# Altium PCB Board.PcbDoc
Units mil, origin at the board's own origin, x right, y up, seen from the top; angles counter-clockwise.
Board outline 1615 x 2290 mil, 2 copper layers (Top Layer, Bottom Layer); 2 components, 6 nets, 110 pads, 5 vias.
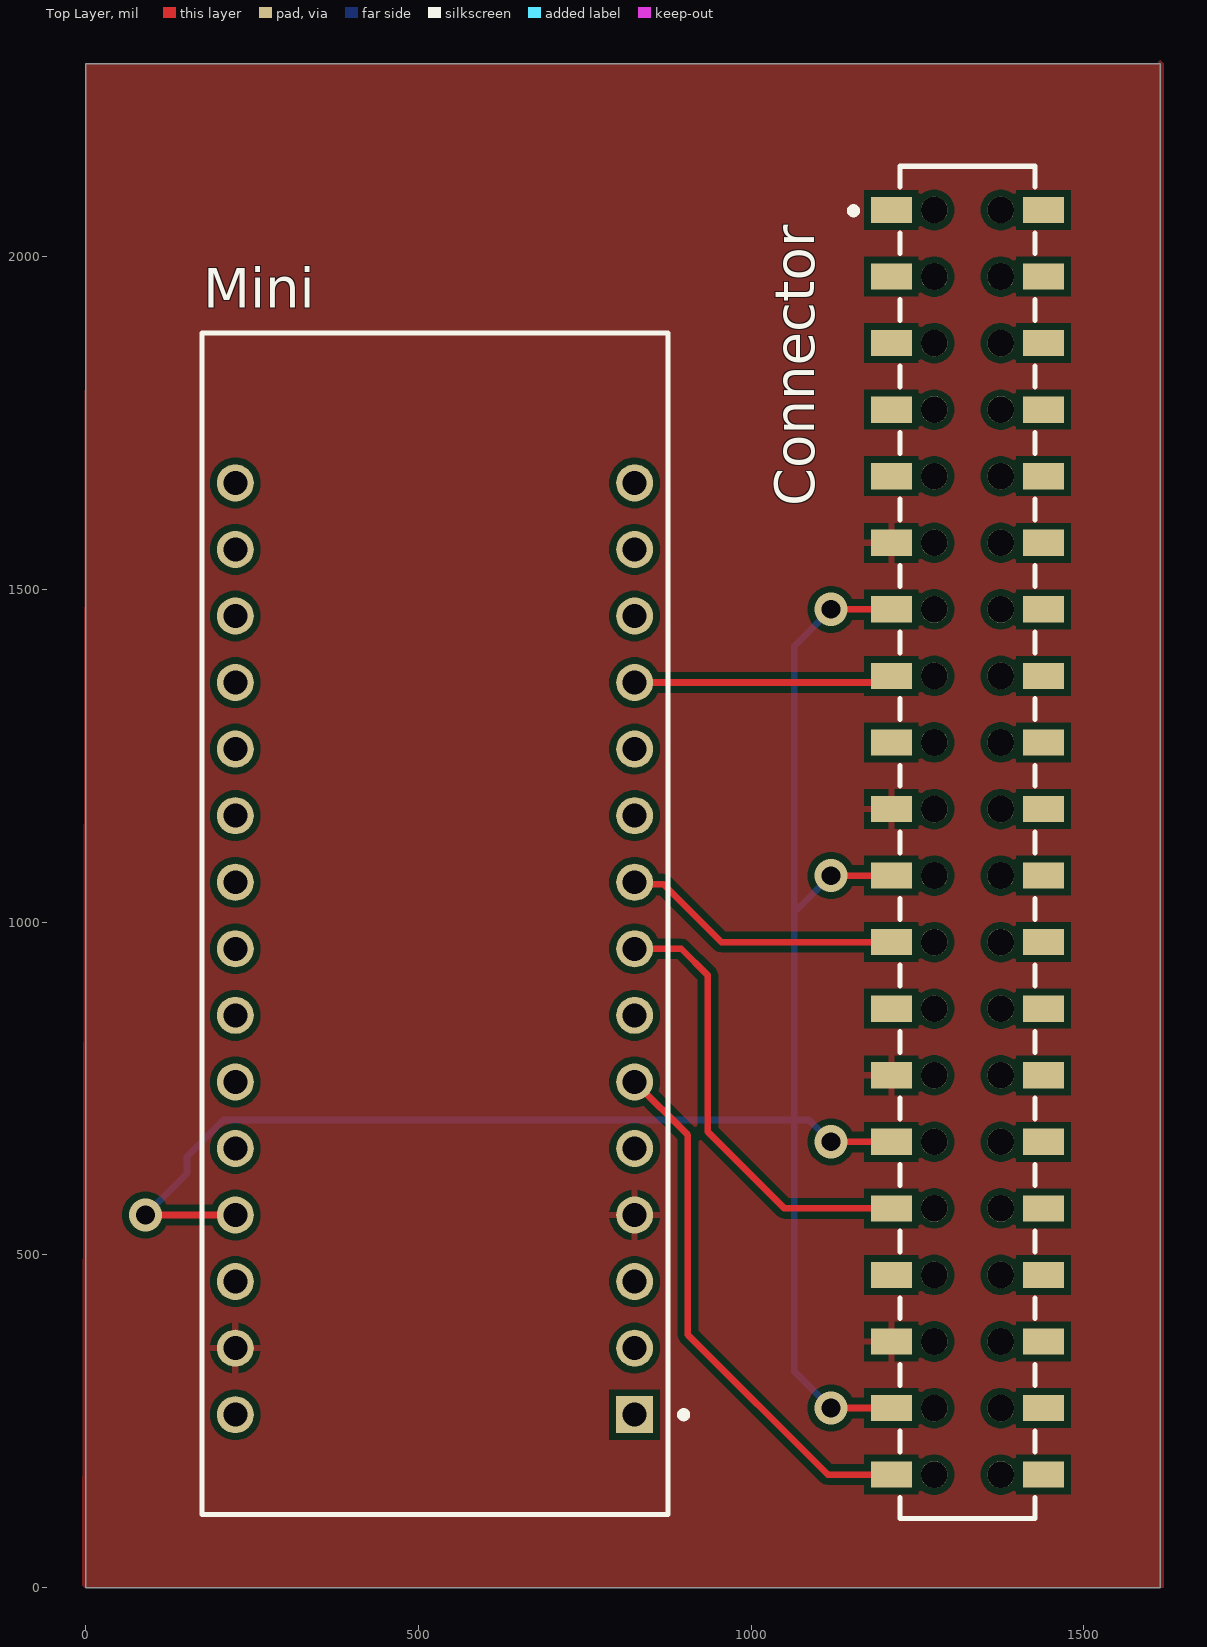
[diagram p0: Top Layer view]
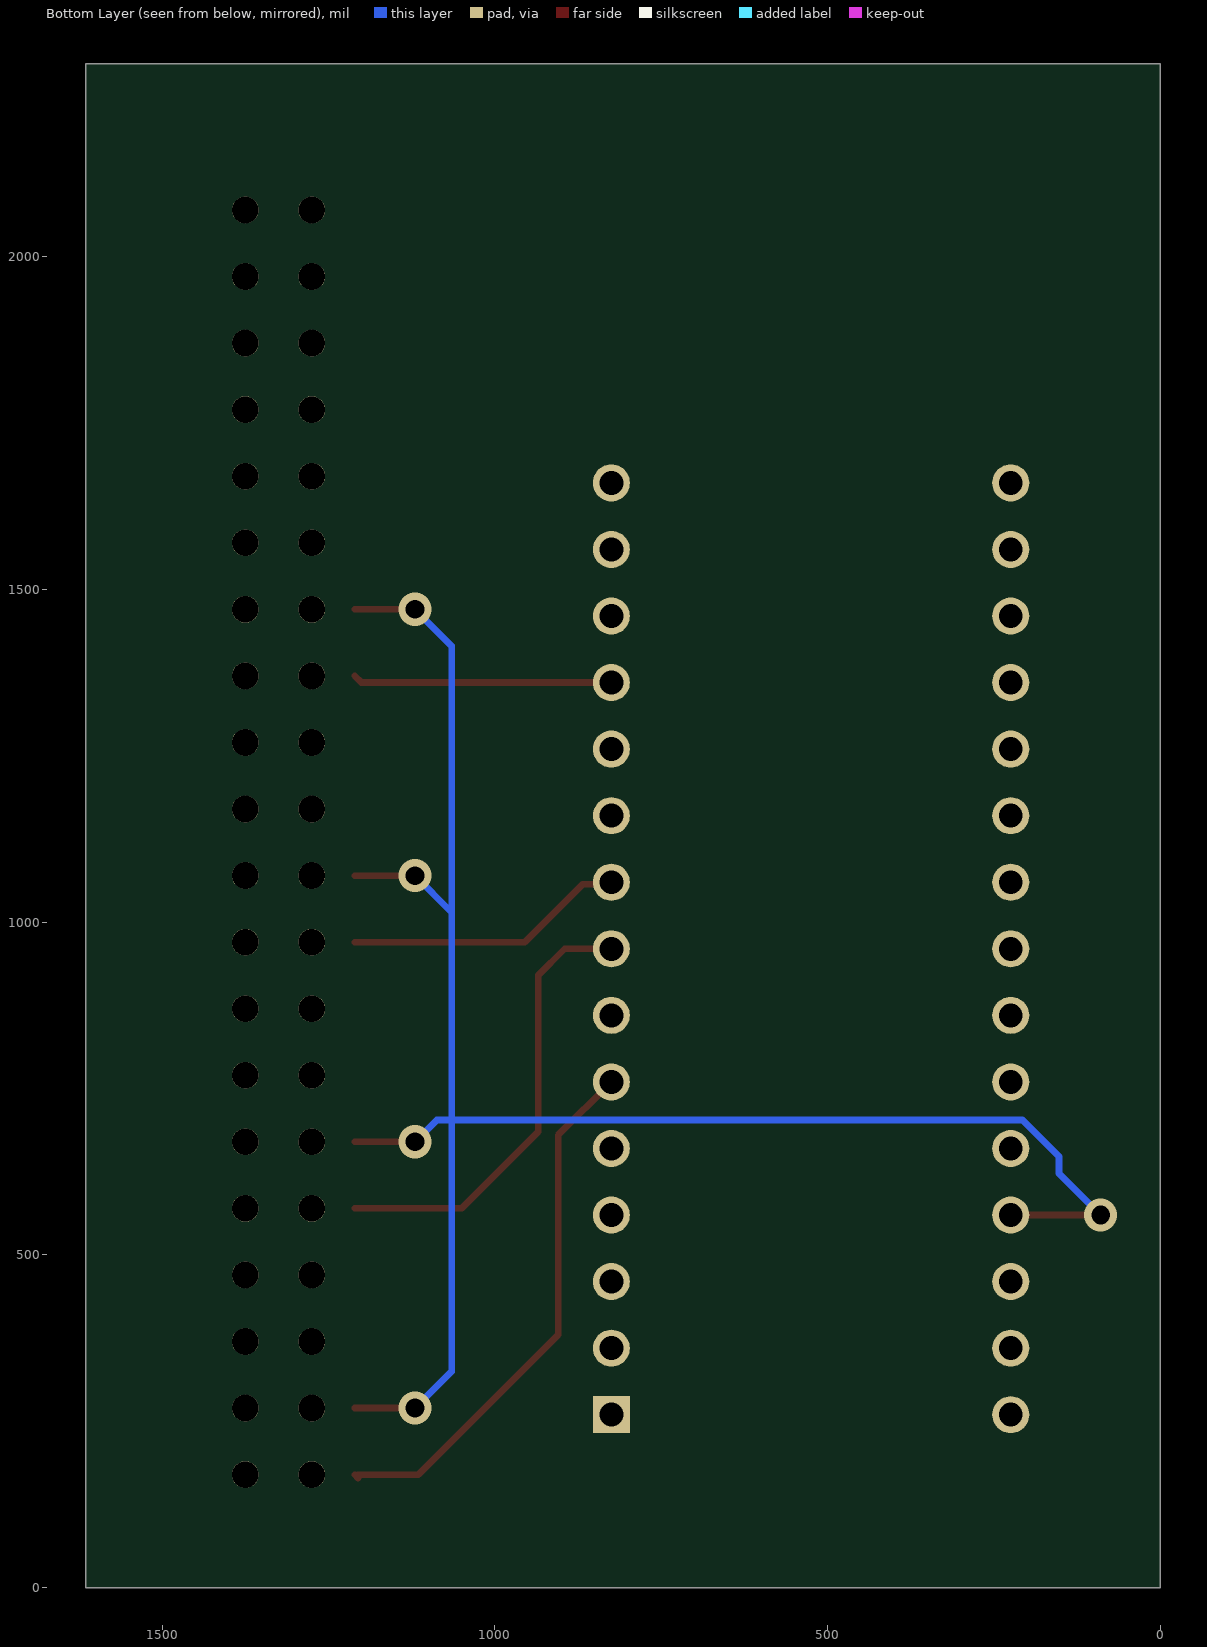
[diagram p1: Bottom Layer view, seen from below]

## Layer stack, top to bottom
Top Solder: solder mask 0.4, Solder Resist, Dk 3.5
Top Layer: signal copper 0.3543
Dielectric 1: dielectric 12.6, FR-4, Dk 4.8
Bottom Layer: signal copper 0.3543
Bottom Solder: solder mask 0.4, Solder Resist, Dk 3.5

## Board outline
0,0 1615,0 1615,2290 0,2290

## Design rules (kind name [scope] priority, off if disabled: settings)
Clearance [All] p1: gap=10 ignorepadtopadclearanceinfootprint=FALSE except(0: Arc-Hole Track-Hole SMDPad-Hole THPad-Hole Via-Hole Fill-Hole Poly-Hole Region-Hole Text-Hole)
PolygonConnect [All] p1: connectstyle=Relief reliefconductorwidth=10 reliefentries=4 polygonreliefangle="90 Angle" airgapwidth=10
RoutingVias [All] p1: holewidth=28 width=50 viastyle="Through Hole" minholewidth=28 minwidth=50 maxholewidth=28 maxwidth=50
SolderMaskExpansion [All] p1: expansion=4 istentingtop=FALSE
Width [All] p1: maxlimit=10 minlimit=10 preferedwidth=10
30 further rules are at their usual default settings.

## Components (designator, comment, footprint, x,y, rotation, side; value= is the part's Value field where it differs from the comment)
Connector "NPTC202KFMS-RC" FP-NPTC202KFMS-RC-MFG 1325,1120 r270 top (schematic designator J?)
Mini "A000005" FP-A000005-MFG 525,997.5 r180 top (schematic designator MD?)

## Footprints (in the part's own frame and the unit in brackets; to place one, negate y for a bottom-side part, rotate by r counter-clockwise, add the part's x,y. Pads: shape width x height; smd on the part's side, far side on the other; paste and mask are expansions set on the pad)
FP-A000005-MFG [mil]
  rect 55.67x55.67 hole 35.98 paste-39370.1 mask+0: 1(-300,737.5)
  round 55.67 hole 35.98 paste-39370.1 mask+0: 2(-300,637.5) 3(-300,537.5) 4(-300,437.5) 5(-300,337.5) 6(-300,237.5) 7(-300,137.5) 8(-300,37.5) 9(-300,-62.5) 10(-300,-162.5) 11(-300,-262.5) 12(-300,-362.5) 13(-300,-462.5) 14(-300,-562.5) 15(-300,-662.5) 16(300,-662.5) 17(300,-562.5) 18(300,-462.5) 19(300,-362.5) 20(300,-262.5) 21(300,-162.5) 22(300,-62.5) 23(300,37.5) 24(300,137.5) 25(300,237.5) 26(300,337.5) 27(300,437.5) 28(300,537.5) 29(300,637.5) 30(300,737.5)
  silkscreen extent -379,-888 350,888, body extent -354,-891 354,891, height 10
FP-NPTC202KFMS-RC-MFG [mm]
  rect 1x1.56 smd paste+0 mask+0: 1(-24.13,-2.905) 2(-24.13,2.905) 3(-21.59,-2.905) 4(-21.59,2.905) 5(-19.05,-2.905) 6(-19.05,2.905) 7(-16.51,-2.905) 8(-16.51,2.905) 9(-13.97,-2.905) 10(-13.97,2.905) 11(-11.43,-2.905) 12(-11.43,2.905) 13(-8.89,-2.905) 14(-8.89,2.905) 15(-6.35,-2.905) 16(-6.35,2.905) 17(-3.81,-2.905) 18(-3.81,2.905) 19(-1.27,-2.905) 20(-1.27,2.905) 21(1.27,-2.905) 22(1.27,2.905) 23(3.81,-2.905) 24(3.81,2.905) 25(6.35,-2.905) 26(6.35,2.905) 27(8.89,-2.905) 28(8.89,2.905) 29(11.43,-2.905) 30(11.43,2.905) 31(13.97,-2.905) 32(13.97,2.905) 33(16.51,-2.905) 34(16.51,2.905) 35(19.05,-2.905) 36(19.05,2.905) 37(21.59,-2.905) 38(21.59,2.905) 39(24.13,-2.905) 40(24.13,2.905)
  round 1.02 hole 1.02 unplated paste-1000 mask+0: ""(-24.13,-1.27) ""(-24.13,1.27) ""(-21.59,-1.27) ""(-21.59,1.27) ""(-19.05,-1.27) ""(-19.05,1.27) ""(-16.51,-1.27) ""(-16.51,1.27) ""(-13.97,-1.27) ""(-13.97,1.27) ""(-11.43,-1.27) ""(-11.43,1.27) ""(-8.89,-1.27) ""(-8.89,1.27) ""(-6.35,-1.27) ""(-6.35,1.27) ""(-3.81,-1.27) ""(-3.81,1.27) ""(-1.27,1.27) ""(-1.27,-1.27) ""(1.27,1.27) ""(1.27,-1.27) ""(3.81,-1.27) ""(3.81,1.27) ""(6.35,-1.27) ""(6.35,1.27) ""(8.89,-1.27) ""(8.89,1.27) ""(11.43,-1.27) ""(11.43,1.27) ""(13.97,-1.27) ""(13.97,1.27) ""(16.51,-1.27) ""(16.51,1.27) ""(19.05,-1.27) ""(19.05,1.27) ""(21.59,-1.27) ""(21.59,1.27) ""(24.13,-1.27) ""(24.13,1.27)
  silkscreen extent -25.8,-4.47 25.8,2.58, body extent -25.9,-3.78 25.9,3.78, height 0.25

## Part data
Connector: library part CMP-25680-000011-1, "CONN HDR 40POS 0.1 TIN SMD", Current Rating=3A, Manufacturer="Sullins Connector Solutions", Package=0, Temperature="-40°C to +105°C", Temperature Range High=+105°C, Temperature Range Low=-40°C, Voltage Rating=250V, Automotive=No, Category=Conn, ComponentLink2Description=Datasheet, ComponentLink2URL=https://s3.amazonaws.com/catalogspreads-pdf/PAGE118-119%20.100%20FEMALE%20HDR.pdf, Conn Gender=Female, Conn Orientation=Straight, Contact Material=Tin,Nickel, Device Class L1=Connectors, Device Class L2="Headers and Wire Housings", Device Class L3=unset, Digikey Description="CONN HDR 40POS 0.1 TIN SMD", Footprint Url=https://drawings-pdf.s3.amazonaws.com/10488.pdf, Height=7.75mm, Is Female=yes, Lead Free=Yes, Manufacturer Part Number=NPTC202KFMS-RC, Number Of Contacts=40, Number Of Rows=2, Octopart=https://octopart.com/nptc202kfms-rc-sullins-270594, Pitch=2.54mm, RoHS=TRUE
Mini: library part CMP-189986-000002-1, "ARDUINO NANO ATMEGA328 EVAL BRD", Operating Supply Voltage=12V, Package Quantity=50, Core Architecture=AVR, Data Bus Width=8b, Evaluation Kit=Yes, Height=0.25inch, Interface=I2C, Length=7inch, Number of Bits=8, Packaging=Bulk, REACH SVHC="No SVHC", Series="AVR® ATmega", Weight=0.358383oz, Width=5inch

## Via types
v1: diameter 50, hole 28, Top Layer to Bottom Layer, 5 vias

## Nets (pads, with @x,y where several pads share a name; then routed paths per layer and width w, separated by ;. In a path a pad name is that pad's centre, name@x,y a point inside that pad or via, vN(x,y) a via of type N, cw(c..) or ccw(c..) an arc to the next point about the centre after c; other vN are vias at no path point)
GND: Connector.11 Connector.19 Connector.27 Connector.35 Mini.4 Mini.29
NetJ?_13: Connector.13 Connector.21 Connector.29 Connector.37 Mini.27 | length 2938.6
  Top Layer w10: v1(90,560) Mini.27 ; v1(1120,270) Connector.37 ; v1(1120,670) Connector.29 ; v1(1120,1070) Connector.21 ; v1(1120,1470) Connector.13
  Bottom Layer w10: v1(90,560) 152.46,622.46 152.46,648.03 207.26,702.83 1065,702.83 ; v1(1120,270) 1065,325 1065,702.83 ; v1(1120,670) 1087.17,702.83 1065,702.83 ; v1(1120,1070) 1065,1015 ; v1(1120,1470) 1065,1415 1065,1015 ; 1065,702.83 1065,1015
NetJ?_15: Connector.15 Mini.12 | length 389.8
  Top Layer w10: Mini.12 1200.63,1360 Connector.15
NetJ?_23: Connector.23 Mini.9 | length 422.9
  Top Layer w10: Mini.9 827.83,1057.17 867.83,1057.17 955,970 Connector.23
NetJ?_31: Connector.31 Mini.8 | length 684.8
  Top Layer w10: Mini.8 895,960 935,920 935,685 1050,570 Connector.31
NetJ?_39: Connector.39 Mini.6 | length 807.8
  Top Layer w10: Mini.6 905,680 905,380 1115,170 Connector.39@1205.63,170 ; Connector.39@1205.63,165 Connector.39
pads on no net: Connector. Connector.1 Connector.2 Connector.3 Connector.4 Connector.5 Connector.6 Connector.7 Connector.8 Connector.9 Connector.10 Connector.12 Connector.14 Connector.16 Connector.17 Connector.18 Connector.20 Connector.22 Connector.24 Connector.25 Connector.26 Connector.28 Connector.30 Connector.32 Connector.33 Connector.34 Connector.36 Connector.38 Connector.40 Mini.1 Mini.2 Mini.3 Mini.5 Mini.7 Mini.10 Mini.11 Mini.13 Mini.14 Mini.15 Mini.16 Mini.17 Mini.18 Mini.19 Mini.20 Mini.21 Mini.22 Mini.23 Mini.24 Mini.25 Mini.26 Mini.28 Mini.30

## Polygon pours and split planes (outlines as drawn)
GND on Top Layer "GND Plane" (solid, pour order 1): 0,2290 1610,2290 1615,2295 1620,2290 1620,0 -5,0